# EAGLE board rc2usb_1 (EAGLE 6.3)
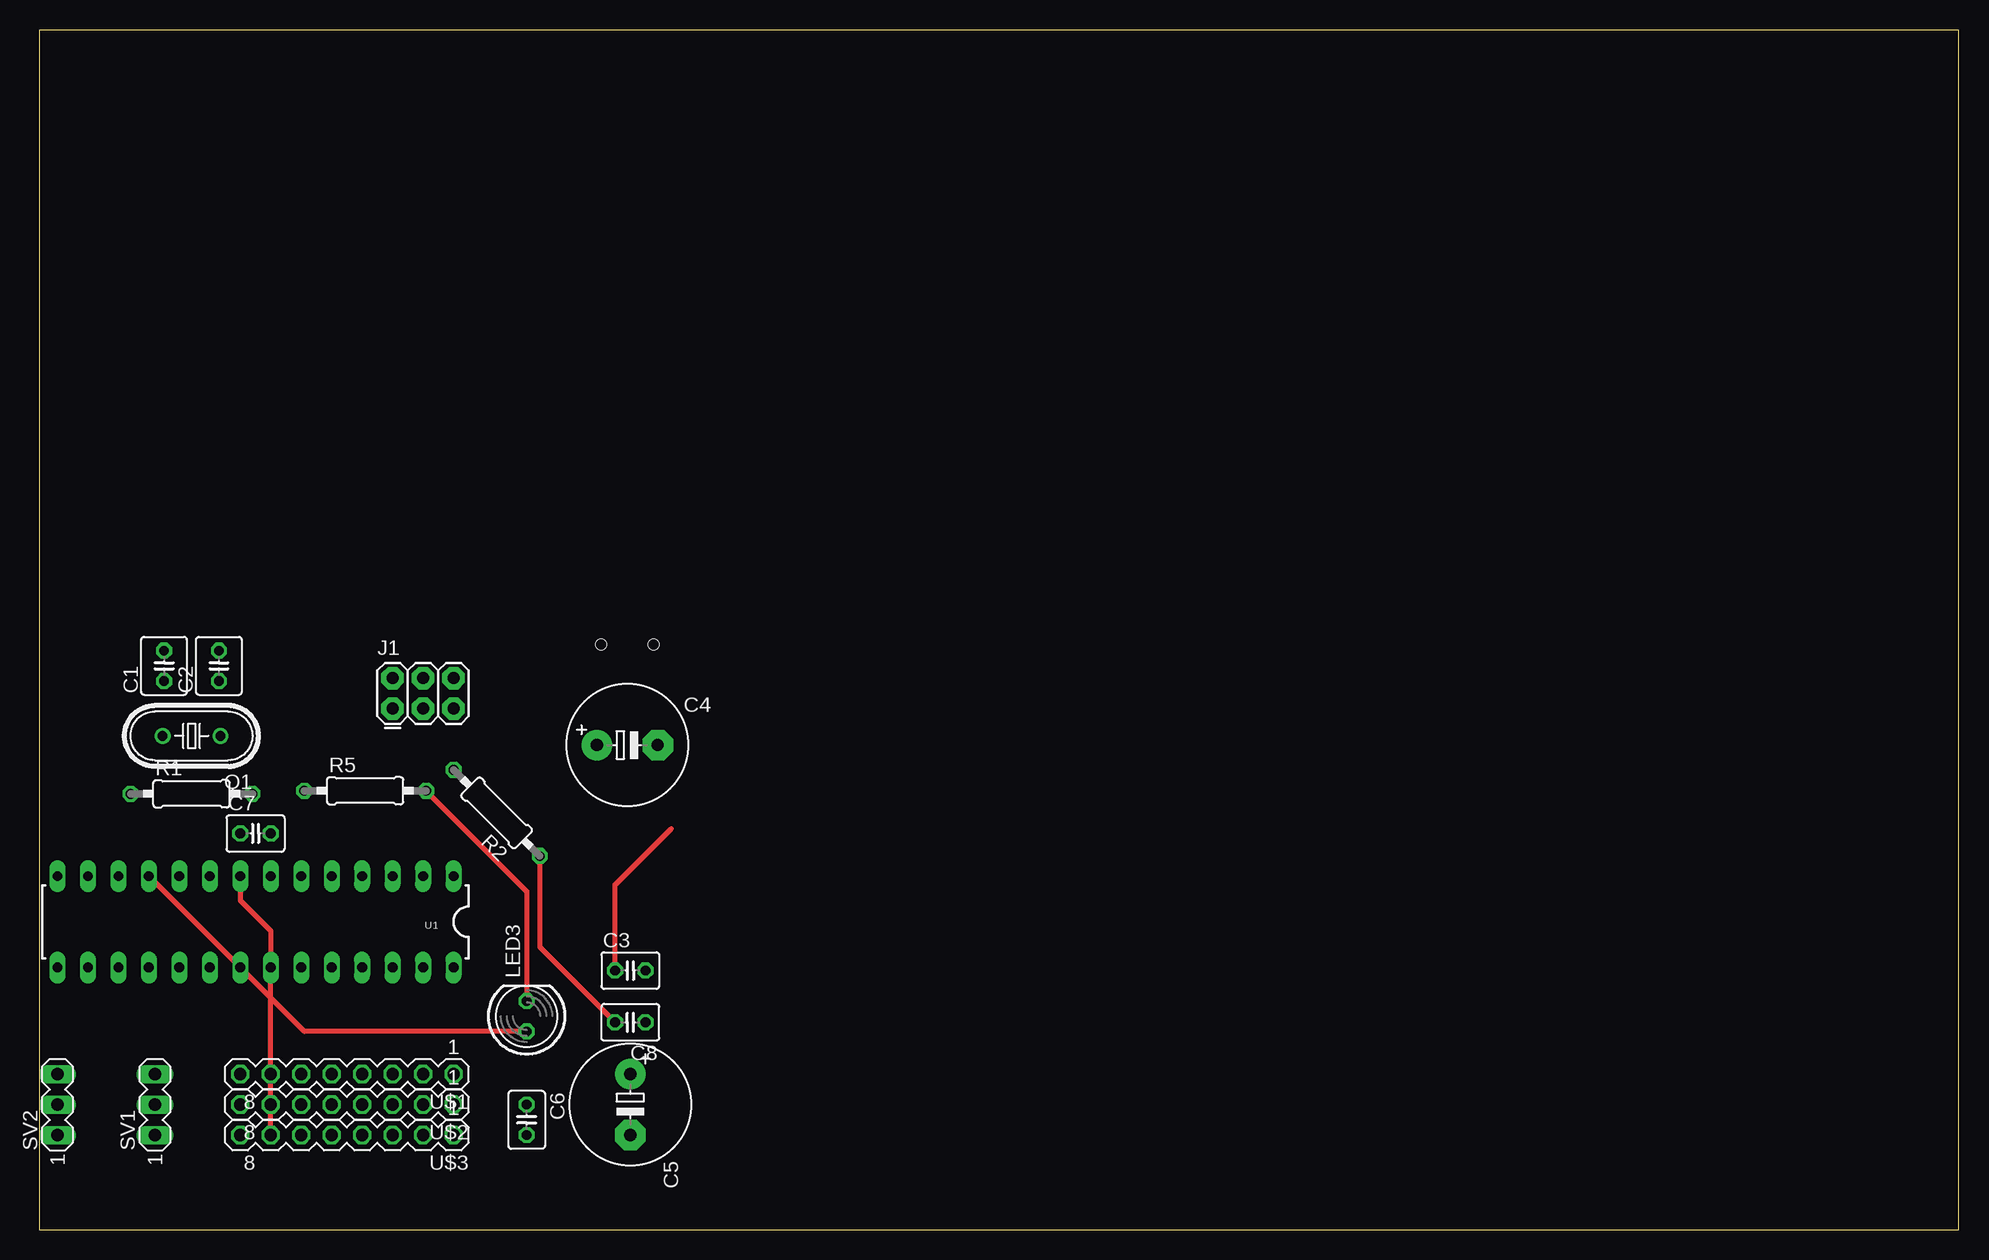
[diagram p0: board, top side]
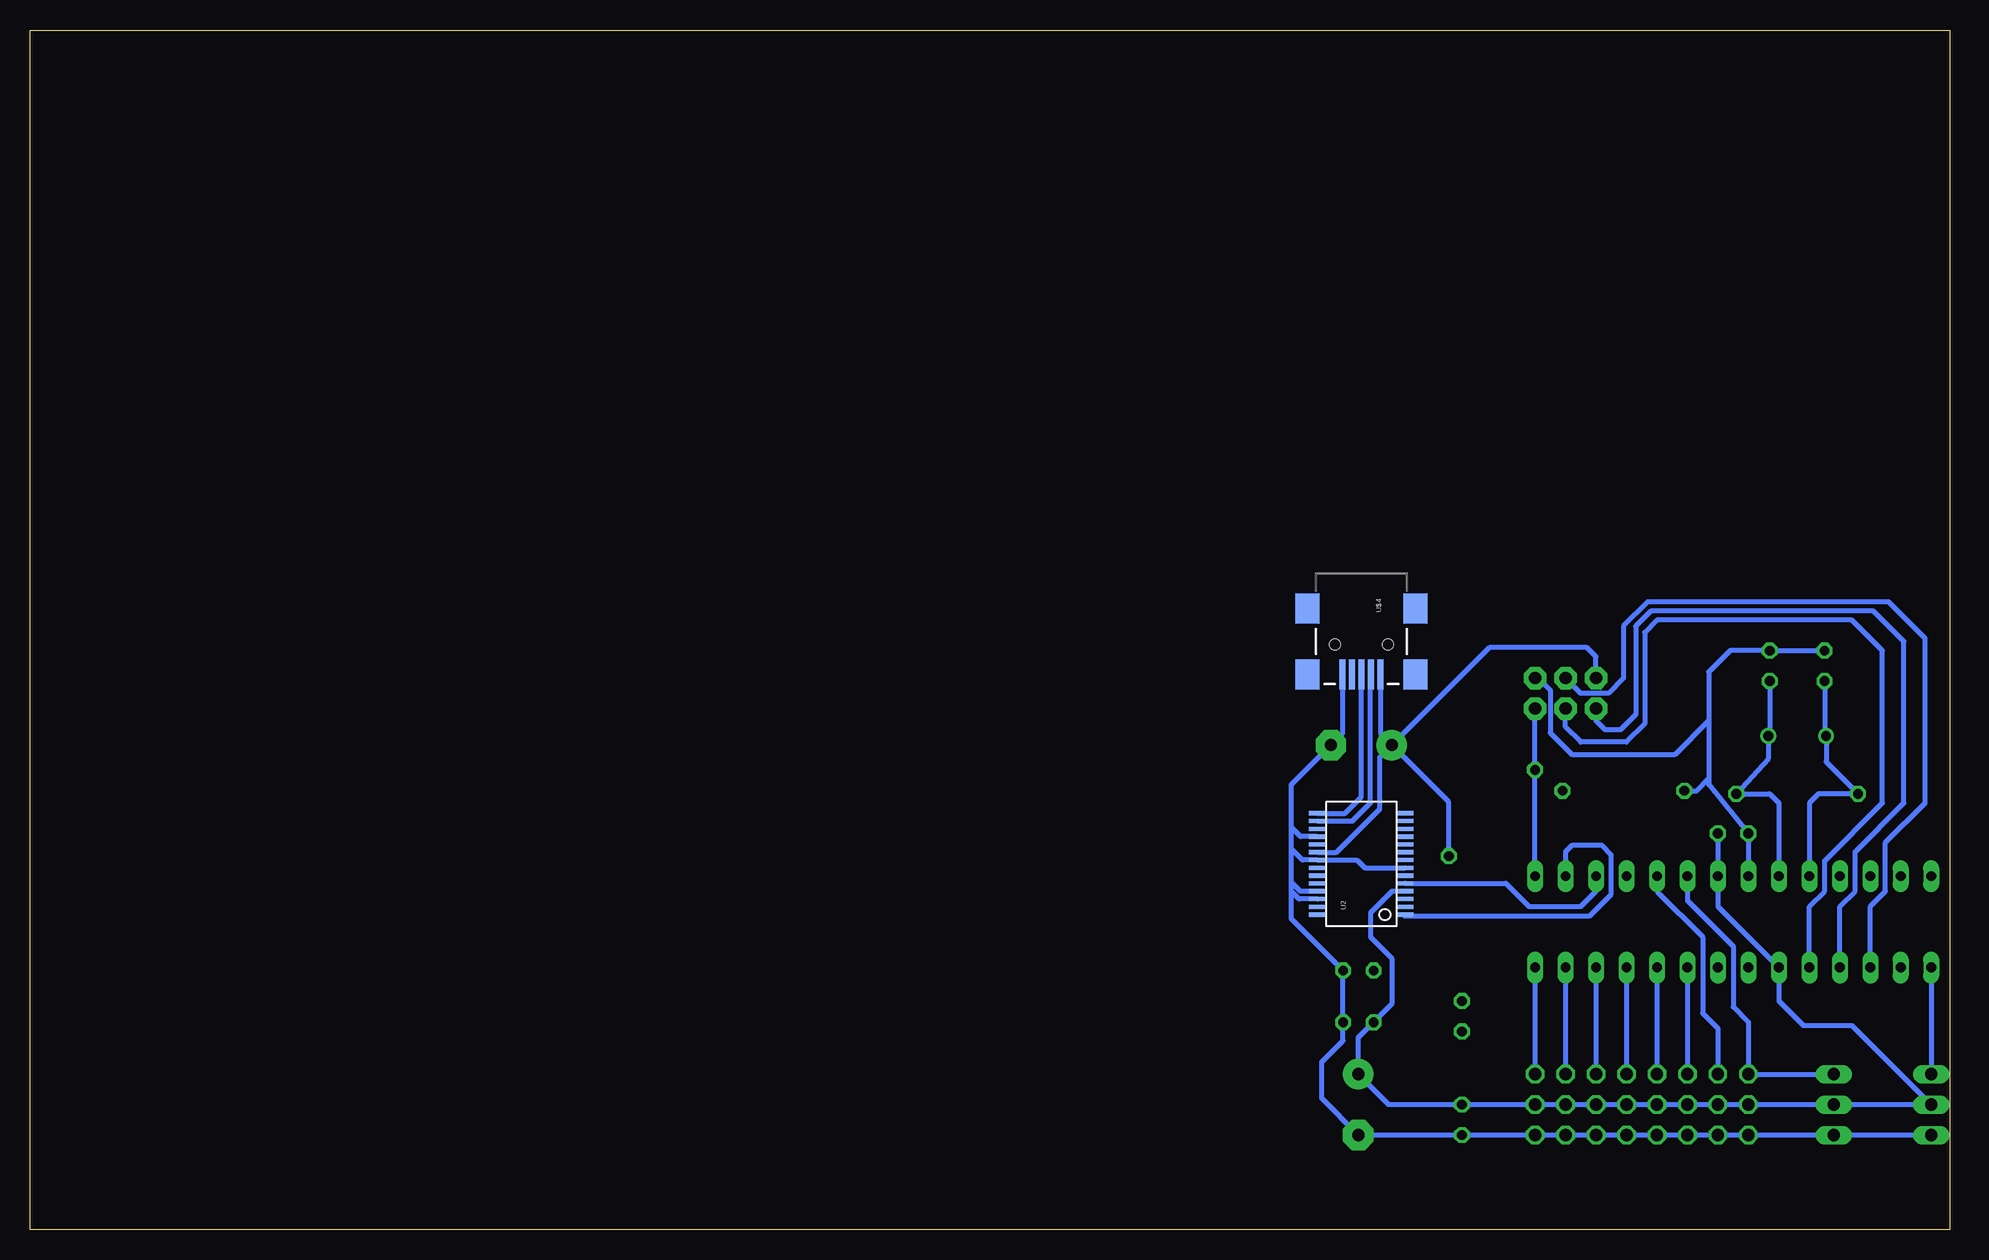
[diagram p1: board, bottom side, seen from below]

Size 160 x 100 mm. Coordinates in mm from the lower left corner, seen from the top.
Outline: 0,0 160,0 160,100 0,100 0,0
Copper layers (1*16): Top 0.035mm / dielectric 1.5mm / Bottom 0.035mm
Design rules "default": minimum track width 10mil, minimum drill 24mil, track to track 8mil, track to pad 8mil, pad to pad 8mil, via to via 8mil, smd to smd 8mil, copper to edge 40mil, drill to drill 8mil, minimum pad ring 10mil, minimum via ring 8mil, stop-mask expansion 4mil, vias tented up to drill 0mil, thermal gap 10mil

## Footprints (pad centres in the part's own frame; a part is rotated, then mirrored left to right if it is on the bottom)
C025-040X050 = drill 0.813 octagon: 1 -1.27,0; 2 1.27,0
C025-030X050 = drill 0.813 octagon: 1 -1.27,0; 2 1.27,0
E5-10,5 = drill 1.016 pad 2.54: + -2.54,0 | drill 1.016 pad 2.54 octagon: - 2.54,0
2X3 = drill 1.016 pad 1.88 octagon: 1 0,0; 2 0,2.54; 3 2.54,0; 4 2.54,2.54; 5 5.08,0; 6 5.08,2.54
LED5MM = drill 0.813 octagon: A -1.27,0; K 1.27,0
HC49U70 = drill 0.813: 1 -2.413,0; 2 2.413,0
0207/10 = drill 0.813 octagon: 1 -5.08,0; 2 5.08,0
MA03-1 = drill 1.016 long: 1 -2.54,0; 2 0,0; 3 2.54,0
DIL28-3 = drill 0.813 long: 1 -16.51,-3.81; 2 -13.97,-3.81; 3 -11.43,-3.81; 4 -8.89,-3.81; 5 -6.35,-3.81; 6 -3.81,-3.81; 7 -1.27,-3.81; 8 1.27,-3.81; 9 3.81,-3.81; 10 6.35,-3.81; 11 8.89,-3.81; 12 11.43,-3.81; 13 13.97,-3.81; 14 16.51,-3.81; 15 16.51,3.81; 16 13.97,3.81; 17 11.43,3.81; 18 8.89,3.81; 19 6.35,3.81; 20 3.81,3.81; 21 1.27,3.81; 22 -1.27,3.81; 23 -3.81,3.81; 24 -6.35,3.81; 25 -8.89,3.81; 26 -11.43,3.81; 27 -13.97,3.81; 28 -16.51,3.81
SSOP28DB = smd 0.348 x 1.397: 1 -4.225,-3.656; 2 -3.575,-3.656; 3 -2.925,-3.656; 4 -2.275,-3.656; 5 -1.625,-3.656; 6 -0.975,-3.656; 7 -0.325,-3.656; 8 0.325,-3.656; 9 0.975,-3.656; 10 1.625,-3.656; 11 2.275,-3.656; 12 2.925,-3.656; 13 3.575,-3.656; 14 4.225,-3.656; 15 4.225,3.656; 16 3.575,3.656; 17 2.925,3.656; 18 2.275,3.656; 19 1.625,3.656; 20 0.975,3.656; 21 0.325,3.656; 22 -0.325,3.656; 23 -0.975,3.656; 24 -1.625,3.656; 25 -2.275,3.656; 26 -2.925,3.656; 27 -3.575,3.656; 28 -4.225,3.656
HEADER_8_WAY = drill 1.016 octagon: 1 -8.89,0; 2 -6.35,0; 3 -3.81,0; 4 -1.27,0; 5 1.27,0; 6 3.81,0; 7 6.35,0; 8 8.89,0
USB-MINIB = smd 2.5 x 0.5: D+ 2.5,0; D- 2.5,0.8; GND 2.5,-1.6; ID 2.5,-0.8; VBUS 2.5,1.6 | smd 2.5 x 2: MTN1 -3,4.5; MTN2 2.5,4.5; MTN3 -3,-4.5; MTN4 2.5,-4.5 | hole 0.9: 0,2.2; 0,-2.2

## Placement (x,y rotation side)
C1  22p  [C025-040X050]  10.41,46.99 90 top
C2  22p  [C025-040X050]  14.99,46.99 90 top
C3  100nF  [C025-030X050]  49.28,21.59 0 top
C4  1000uF  [E5-10,5]  49.02,40.39 0 top
C5  1000uF  [E5-10,5]  49.28,10.41 270 top
C6  100nF  [C025-030X050]  40.64,9.14 270 top
C7  100nF  [C025-030X050]  18.03,33.02 0 top
C8  100nF  [C025-030X050]  49.28,17.27 180 top
J1  AVR_SPI_PRG_6PTH  [2X3]  29.46,43.43 0 top
LED3  [LED5MM]  40.64,17.78 90 top
Q1  16MHz  [HC49U70]  12.7,41.15 180 top
R1  1M  [0207/10]  12.7,36.32 0 top
R2  [0207/10]  38.14,34.72 135 top
R5  680  [0207/10]  27.18,36.58 0 top
SV1  [MA03-1]  9.65,10.41 90 top
SV2  [MA03-1]  1.52,10.41 90 top
U1  ATMEGA328P_PDIP  [DIL28-3]  18.03,25.65 180 top
U2  FT232RL-BASICSSOP  [SSOP28DB]  49.02,30.48 90 bottom
U$1  HEADER_8_WAY  [HEADER_8_WAY]  25.65,12.95 180 top
U$2  HEADER_8_WAY  [HEADER_8_WAY]  25.65,10.41 180 top
U$3  HEADER_8_WAY  [HEADER_8_WAY]  25.65,7.87 180 top
U$4  USB-MINIB-5PIN  [USB-MINIB]  49.02,48.77 270 bottom

## Library data of the parts
C1 C2 R1 R2 R5 = resistor
C3-C8 = rcl
J1 U$4 = SparkFun-Connectors
LED3 = led
Q1 = crystal; OC_FARNELL: unknown; OC_NEWARK: unknown
SV1 SV2 = con-lstb; OC_FARNELL: unknown; OC_NEWARK: unknown
U1 U2 = SparkFun-DigitalIC
U$1-U$3 = rc2usb

## Nets
+5V: C4.+ C5.+ C6.1 C7.2 C8.2 J1.2 R2.1 SV1.2 SV2.2 U1.7 U1.20 U2.4 U2.20 U$2.1 U$2.2 U$2.3 U$2.4 U$2.5 U$2.6 U$2.7 U$2.8 U$4.VBUS
GND: C1.2 C2.2 C3.2 C4.- C5.- C6.2 C7.1 C8.1 J1.6 R5.1 SV1.1 SV2.1 U1.8 U1.22 U2.7 U2.18 U2.21 U2.25 U2.26 U$3.1 U$3.2 U$3.3 U$3.4 U$3.5 U$3.6 U$3.7 U$3.8 U$4.GND
N$1: C2.1 Q1.1 R1.2 U1.9
N$2: C1.1 Q1.2 R1.1 U1.10
N$3: J1.4 U1.17
N$4: J1.1 U1.18
N$5: J1.3 U1.19
N$6: U2.15 U$4.D+
N$7: U2.16 U$4.D-
N$8: U1.24 U$1.5
N$9: C3.1 U2.17
N$14: U1.25 U$1.4
N$15: U1.26 U$1.3
N$16: U1.23 U$1.6
N$17: U1.27 U$1.2
N$18: U1.28 U$1.1
N$19: U1.5 U$1.7
N$20: SV1.3 U1.6 U$1.8
N$21: LED3.A U1.11
N$22: SV2.3 U1.15
N$23: LED3.K R5.2
RESET: J1.5 R2.2 U1.1
RXD: U1.2 U2.1
TXD: U1.3 U2.5

## Tracks (layer width: path | path; a pad name or v marks a point on that pad's centre or on a via)
+5V
  Top 0.406: R2.1 41.73,23.54 C8.2
  Bottom 0.406: U$4.VBUS 47.42,41.33 C4.+ | U2.20 51.09,31.45 47.5,35.05 47.5,39.37 C4.+ | R2.1 41.73,35.64 C4.+ | C7.2 U1.7 19.3,26.92 U1.20 14.22,19.05 12.19,17.02 8.13,17.02 SV2.2 SV1.2 U$2.8 U$2.7 U$2.6 U$2.5 U$2.4 U$2.3 U$2.2 U$2.1 C6.1 46.74,10.41 C5.+ 49.28,16 C8.2 46.48,18.8 46.48,22.61 48.26,24.38 48.26,26.42 46.47,28.2 U2.4 | J1.2 29.46,47.75 30.23,48.51 38.35,48.51 C4.+
GND
  Top 0.406: U1.8 16.76,27.43 19.3,24.89 U1.22 U$3.7
  Bottom 0.406: U$4.GND 50.62,41.33 C4.- 54.86,37.08 54.86,33.53 | SV2.1 SV1.1 U$3.8 U$3.7 U$3.6 U$3.5 U$3.4 U$3.3 U$3.2 U$3.1 C6.2 C5.- 52.32,10.92 52.32,13.97 50.55,15.75 C8.1 C3.2 54.86,25.91 54.86,28.19 | 54.86,28.19 54.86,28.96 | 54.86,28.96 54.86,31.75 | 54.86,31.75 54.86,33.53 | U2.26 54.23,27.55 54.86,28.19 | U2.25 54.11,28.2 54.86,28.96 | U2.18 54.09,32.76 54.86,33.53 | 54.86,31.75 53.92,30.8 U2.21 49.4,30.8 48.74,30.15 U2.7 | C1.2 C2.2 18.29,48.26 20.07,46.48 20.07,42.42 | U1.8 C7.1 20.07,37.08 20.07,37.59 | 20.07,42.42 20.07,37.59 | U1.22 19.3,21.59 | J1.6 34.29,45.97 33.27,44.96 33.27,41.4 31.5,39.62 22.86,39.62 20.07,42.42 | R5.1 21.08,36.58 20.07,37.59
N$1
  Bottom 0.406: C2.1 14.99,41.27 Q1.1 15.11,39.24 R1.2 14.99,36.32 14.22,35.56 U1.9
N$2
  Bottom 0.406: C1.1 10.41,41.27 Q1.2 10.29,38.99 R1.1 10.92,36.32 11.68,35.56 U1.10
N$3
  Bottom 0.406: U1.17 6.6,26.92 5.33,28.19 5.33,32.26 2.03,35.56 2.03,49.28 5.08,52.32 25.15,52.32 27.18,50.29 27.18,45.97 28.45,44.7 30.73,44.7 J1.4
N$4
  Bottom 0.406: U1.18 9.14,26.92 7.87,28.19 7.87,31.5 3.81,35.56 3.81,49.02 6.35,51.56 24.89,51.56 26.16,50.29 26.16,42.93 27.43,41.66 28.7,41.66 29.46,42.42 J1.1
N$5
  Bottom 0.406: U1.19 11.68,26.92 10.41,28.19 10.41,30.73 5.59,35.56 5.59,48.26 8.13,50.8 24.38,50.8 25.4,49.78 25.4,42.16 26.92,40.64 30.73,40.64 32,41.91 J1.3
N$6
  Bottom 0.406: U2.15 50.38,34.7 49.02,36.07 U$4.D+
N$7
  Bottom 0.406: U2.16 49.77,34.05 48.26,35.56 48.26,46.23 U$4.D-
N$8
  Bottom 0.406: U1.24 U$1.5
N$9  (1 unrouted)
  Top 0.406: C3.1 48.01,28.73 U2.17
N$14
  Bottom 0.406: U1.25 U$1.4
N$15
  Bottom 0.406: U1.26 U$1.3
N$16
  Bottom 0.406: U1.23 U$1.6
N$17
  Bottom 0.406: U1.27 U$1.2
N$18
  Bottom 0.406: U1.28 U$1.1
N$19
  Bottom 0.406: U1.5 24.38,28.19 20.57,24.38 20.57,18.03 19.3,16.76 U$1.7
N$20
  Bottom 0.406: U1.6 21.84,27.43 18.03,23.62 18.03,18.54 16.76,17.27 U$1.8 SV1.3
N$21
  Top 0.406: LED3.A 22.1,16.51 U1.11
N$22
  Bottom 0.406: U1.15 SV2.3
N$23
  Top 0.406: R5.2 40.64,28.19 LED3.K
RESET
  Bottom 0.406: U1.1 R2.2 J1.5
RXD
  Bottom 0.406: U2.1 45.47,26.16 29.97,26.16 28.19,27.94 28.19,31.24 28.96,32 31.5,32 32,31.5 U1.2
TXD
  Bottom 0.406: U2.5 36.98,28.86 35.05,26.92 30.73,26.92 29.46,28.19 U1.3